# Altium PCB SFCmasterD.PcbDoc (part 4 of 7)
Units mm, origin at the board's own origin, x right, y up, seen from the top; angles counter-clockwise.
Board outline 152.4 x 101.6 mm, 2 copper layers (Top Layer, Bottom Layer); 249 components, 250 nets, 987 pads, 265 vias.
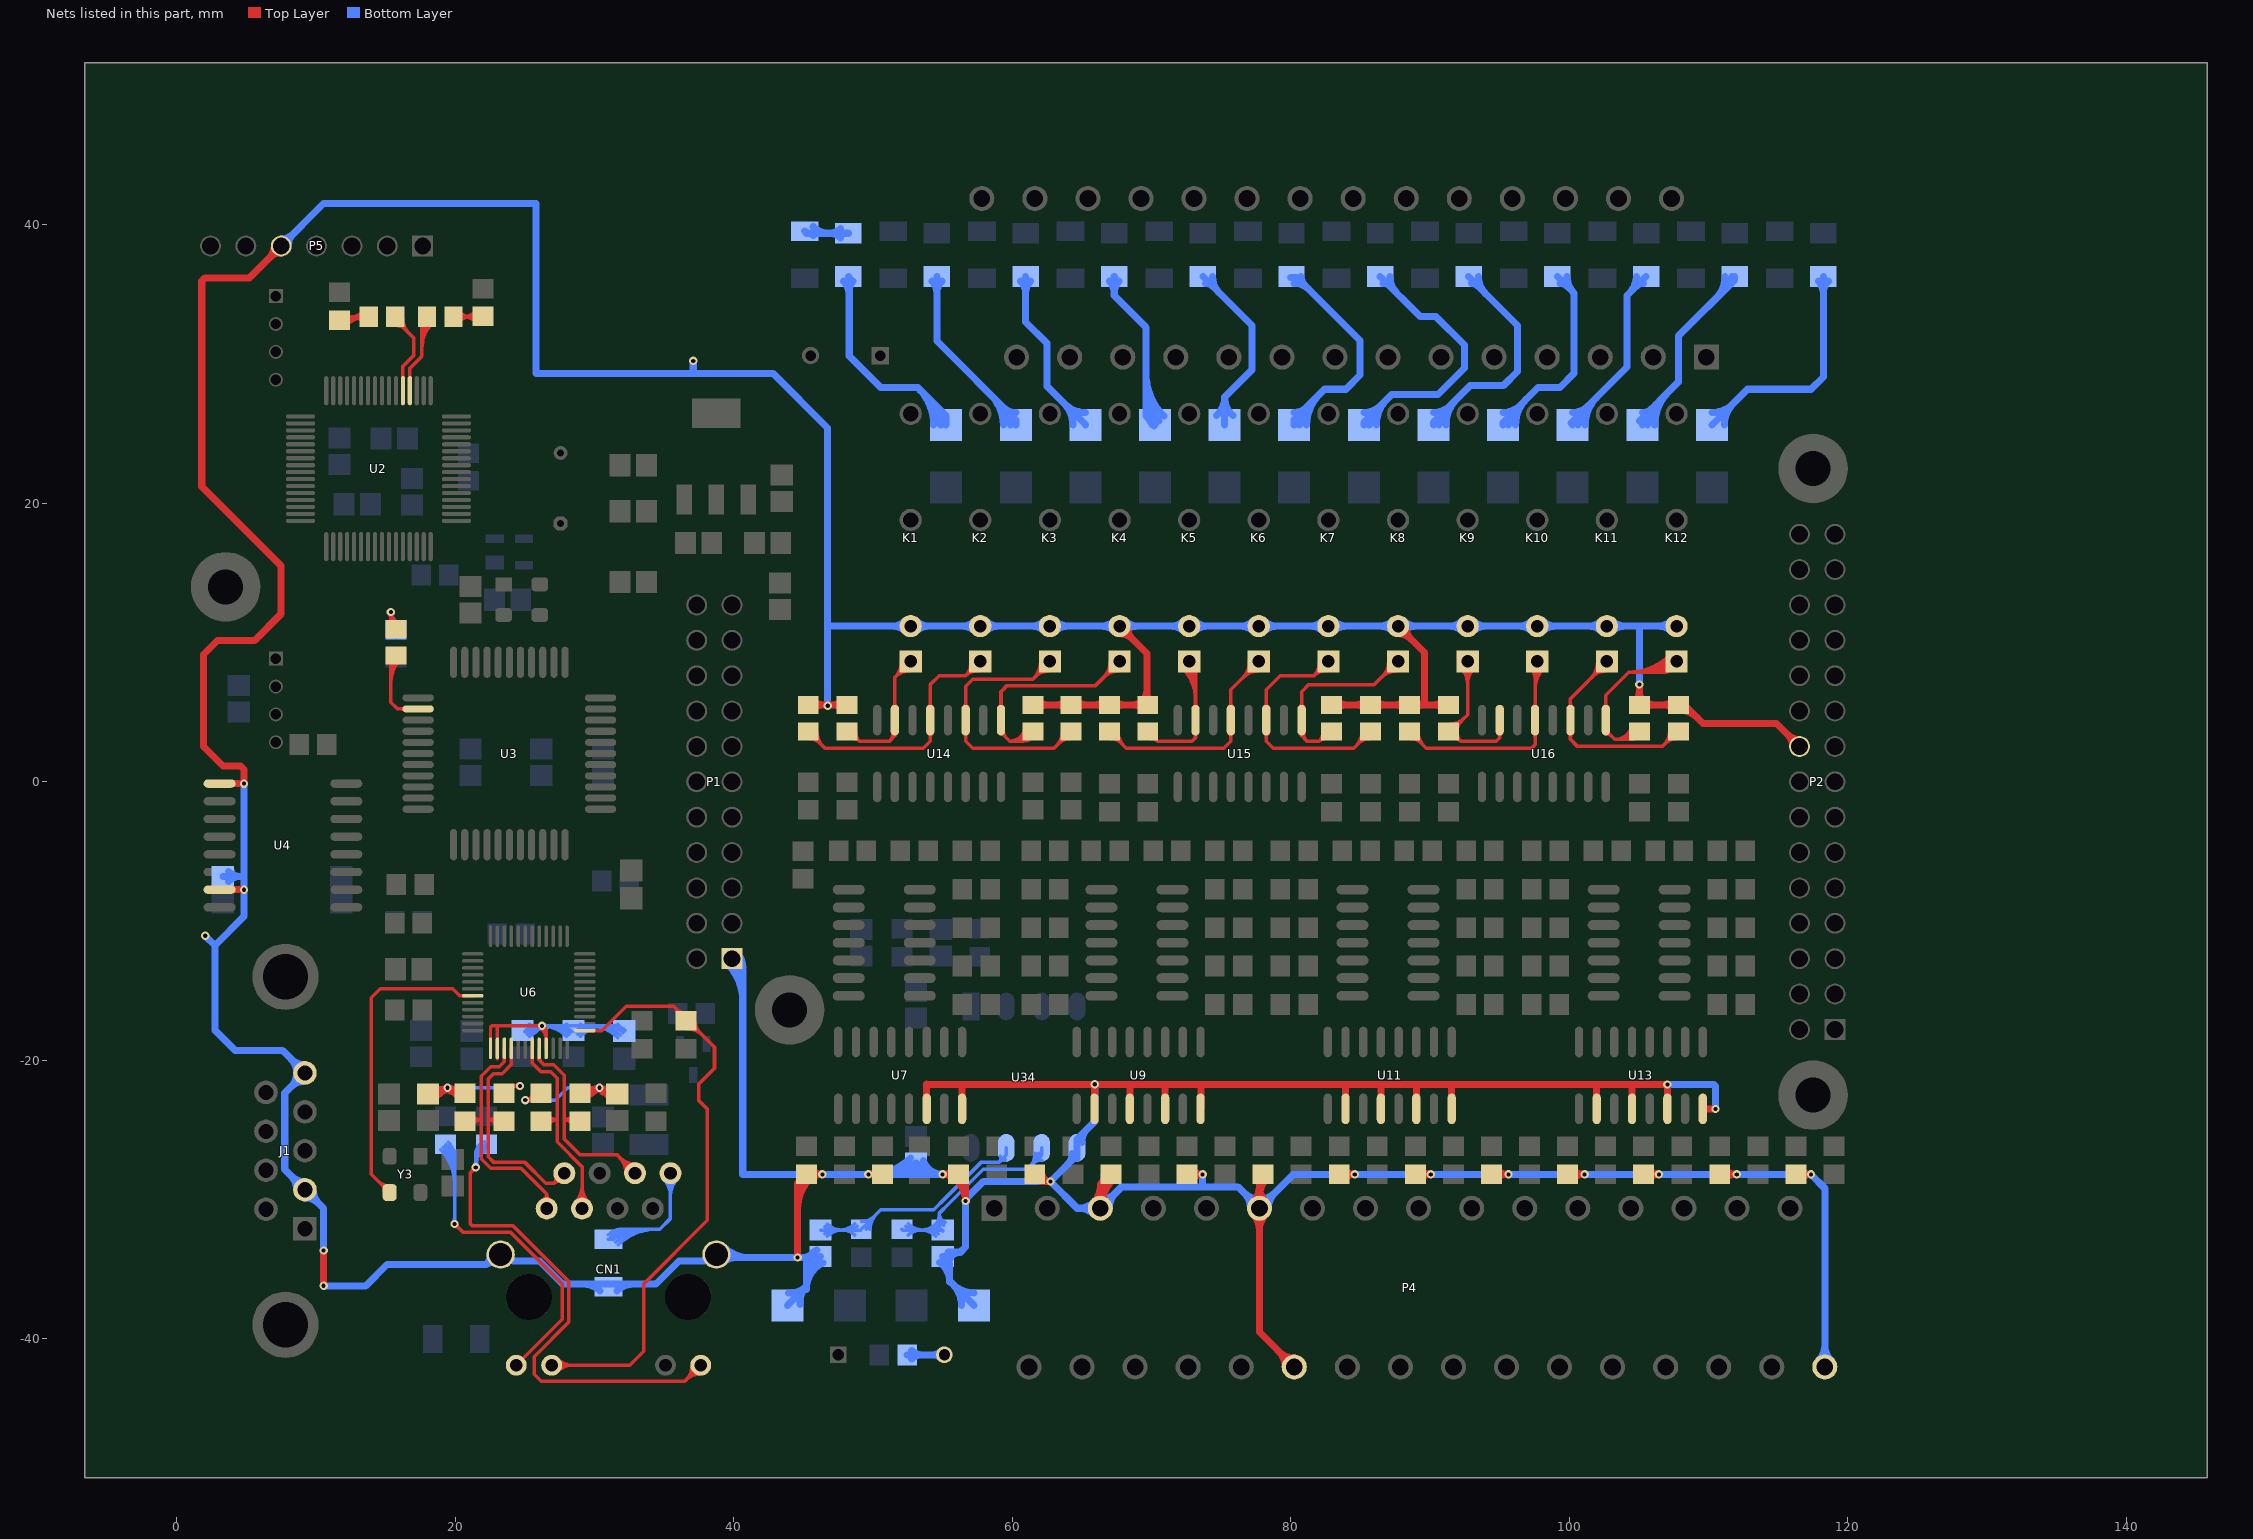
[diagram p4: the nets of this part, all layers, seen from the top]

## Via types
v1: diameter 0.6, hole 0.3, Top Layer to Bottom Layer, 265 vias

## Nets (pads, with @x,y where several pads share a name; then routed paths per layer and width w, separated by ;. In a path a pad name is that pad's centre, name@x,y a point inside that pad or via, vN(x,y) a via of type N, cw(c..) or ccw(c..) an arc to the next point about the centre after c; other vN are vias at no path point) (continued)
GNDA: C24.1 C25.1 C26.2 C41.2 CN1.13 CN1.14 D10.1 D12.1 D14.1 D16.1 D18.1 D20.1 D22.1 D24.1 D26.1 D28.1 D30.1 D32.1 D33.1 D34.1 J1.2 J1.5 K1.5 K2.5 K3.5 K4.5 K5.5 K6.5 K7.5 K8.5 K9.5 K10.5 K11.5 K12.5 LR3.2 P1.1 P2.18 P4.5 P4.11 P4.12 P4.32 P5.5 R22.1 R27.1 R32.1 R37.1 R42.1 R47.1 R52.1 R69.1 R74.1 R79.1 R84.1 R89.1 R94.1 R99.1 U4.9 U4.15 U7.6 U7.8 U9.2 U9.4 U9.6 U9.8 U11.2 U11.4 U11.6 U11.8 U13.2 U13.4 U13.6 U13.8 U34.5 | length 781
  Top Layer w0.508: U4.15@3.07,-7.747 v1(4.826,-7.747) ; U4.9@3.07,-0.127 v1(4.826,-0.127) 4.826,0.889 4.572,1.143 3.302,1.143 1.905,2.54 1.905,9.144 2.921,10.16 5.588,10.16 7.493,12.065 7.493,15.494 1.789,21.198 1.789,35.952 2.032,36.195 5.207,36.195 P5.5@7.493,38.481 ; P5.5@6.997,38.481 cw(c5.8,38.481) 6.646,37.634 cw(c7.493,36.788) P5.5@7.493,37.985 ; v1(10.541,-36.195) v1(10.541,-33.655) ; v1(44.577,-34.163) 44.577,-28.813 R22.1@45.212,-28.178 45.228,-28.194 v1(46.355,-28.194) cw(c46.355,-27.116) R22.1@45.582,-27.867 ; 44.577,-30.667 cw(c47.651,-30.667) R22.1@45.477,-28.493 ; 44.577,-29.441 cw(c46.425,-29.441) R22.1@45.118,-28.134 ; D12.1@45.339,5.522 D10.1@48.133,5.522 ; R22.1@45.577,-28.493 cw(c46.3,-29.216) v1@46.3,-28.194 ; D12.1@45.719,5.242 cw(c46.395,4.566) 46.395,5.522 cw(c46.395,6.478) D12.1@45.719,5.802 ; D10.1@47.753,5.242 ccw(c47.077,4.566) 47.077,5.522 ccw(c47.077,6.478) D10.1@47.753,5.802 ; R27.1@50.282,-27.897 cw(c49.657,-27.389) v1(49.657,-28.194) ; R27.1@50.297,-28.478 ccw(c49.657,-29.059) v1(49.657,-28.194) ; R27.1@50.678,-28.178 50.694,-28.194 v1(49.657,-28.194) ; U7.6@53.848,-23.482 53.848,-21.717 53.868,-21.737 56.388,-21.737 ; v1@55.055,-28.194 cw(c55.055,-29.216) R32.1@55.778,-28.493 ; R32.1@55.775,-27.865 cw(c54.991,-27.094) v1(54.991,-28.194) R32.1@56.159,-28.194 ; R32.1@55.9,-28.514 cw(c54.466,-30.151) v1@56.642,-30.151 ; R32.1@56.143,-28.178 R32.1@56.159,-28.194 ; R32.1@56.234,-28.131 cw(c55.447,-29.03) 56.642,-29.03 ; U7.8@56.388,-23.482 56.388,-21.737 ; v1(56.642,-30.099) 56.642,-28.677 R32.1@56.159,-28.194 ; D16.1@61.468,5.522 D14.1@64.22,5.522 D20.1@66.971,5.522 D18.1@69.723,5.522 ; R37.1@61.597,-28.185 ccw(c62.173,-28.123) R37.1@62.173,-28.702 ; R37.1@61.609,-28.178 62.133,-28.702 v1(62.738,-28.702) cw(c62.738,-28.063) R37.1@62.103,-28.131 ; D16.1@61.848,5.242 cw(c62.524,4.566) 62.524,5.522 cw(c62.524,6.478) D16.1@61.848,5.802 ; D14.1@63.84,5.242 ccw(c63.164,4.566) 63.164,5.522 ccw(c63.164,6.478) D14.1@63.84,5.802 ; D14.1@64.6,5.242 cw(c65.276,4.566) 65.276,5.522 cw(c65.276,6.478) D14.1@64.6,5.802 ; P4.5@65.857,-30.165 ccw(c64.754,-29.062) 66.314,-29.062 ccw(c67.874,-29.062) P4.5@66.771,-30.165 ; U9.2@65.893,-23.482 v1@65.893,-21.737 ; P4.5@66.314,-30.723 cw(c69.246,-30.723) R42.1@67.318,-28.514 ; P4.5@66.314,-30.622 66.314,-28.939 ; 66.314,-29.605 cw(c68.271,-29.605) R42.1@66.984,-28.131 ; 66.349,-28.904 cw(c67.025,-29.58) R42.1@67.025,-28.624 ; R42.1@66.58,-28.214 cw(c65.664,-28.289) 66.314,-28.939 ; D20.1@66.591,5.242 ccw(c65.915,4.566) 65.915,5.522 ccw(c65.915,6.478) D20.1@66.591,5.802 ; R42.1@67.075,-28.178 66.314,-28.939 ; D20.1@67.351,5.242 cw(c68.027,4.566) 68.027,5.522 cw(c68.027,6.478) D20.1@67.351,5.802 ; K4.5@67.696,10.638 cw(c67.696,9.32) 68.628,10.252 cw(c69.56,11.184) K4.5@68.242,11.184 ; K4.5@67.696,11.184 69.657,9.223 D18.1@69.657,5.522 ; U9.4@68.433,-23.482 68.433,-21.737 ; D18.1@69.343,5.242 ccw(c68.667,4.566) 68.667,5.522 ccw(c68.667,6.478) 69.343,5.802 ccw(c68.585,6.56) 69.657,6.56 ; 69.657,6.396 ccw(c70.497,6.396) D18.1@69.903,5.802 ; U9.6@70.973,-23.482 70.973,-21.737 ; R47.1@72.54,-28.178 72.556,-28.194 v1(73.66,-28.194) cw(c73.66,-27.171) R47.1@72.915,-27.872 ; R47.1@72.906,-28.493 cw(c73.629,-29.216) v1@73.629,-28.194 ; U9.8@73.513,-23.482 73.533,-23.462 73.533,-21.758 73.513,-21.737 ; P4.11@77.287,-31.079 cw(c76.184,-32.182) 77.744,-32.182 cw(c79.304,-32.182) P4.11@78.201,-31.079 ; P4.11@77.287,-30.165 ccw(c76.184,-29.062) 77.744,-29.062 ccw(c79.304,-29.062) P4.11@78.201,-30.165 ; P4.11@77.744,-29.767 cw(c79.545,-29.767) R52.1@78.272,-28.493 ; R52.1@78.006,-28.178 77.744,-28.44 P4.11@77.744,-30.622 77.744,-39.522 P4.12@80.244,-42.022 ; P4.12@79.598,-42.022 ccw(c78.038,-42.022) 79.141,-40.919 ccw(c80.244,-39.816) P4.12@80.244,-41.376 ; D24.1@82.931,5.522 D22.1@85.725,5.522 D28.1@88.519,5.522 D26.1@91.313,5.522 ; D24.1@83.311,5.242 cw(c83.987,4.566) 83.987,5.522 cw(c83.987,6.478) D24.1@83.311,5.802 ; R69.1@83.472,-28.178 83.488,-28.194 v1(84.582,-28.194) cw(c84.582,-27.193) R69.1@83.849,-27.874 ; R69.1@83.837,-28.493 cw(c84.56,-29.216) v1@84.56,-28.194 ; U11.2@83.927,-23.482 83.927,-21.737 ; D22.1@85.345,5.242 ccw(c84.669,4.566) 84.669,5.522 ccw(c84.669,6.478) D22.1@85.345,5.802 ; D22.1@86.105,5.242 cw(c86.781,4.566) 86.781,5.522 cw(c86.781,6.478) D22.1@86.105,5.802 ; U11.4@86.467,-23.482 86.467,-21.737 ; K8.5@87.696,10.638 cw(c87.696,9.32) 88.628,10.252 cw(c89.56,11.184) K8.5@88.242,11.184 ; K8.5@87.696,11.184 89.596,9.284 89.596,5.588 ; D28.1@88.139,5.242 ccw(c87.463,4.566) 87.463,5.522 ccw(c87.463,6.478) D28.1@88.139,5.802 ; D28.1@88.899,5.242 cw(c89.575,4.566) 89.575,5.522 cw(c89.575,6.478) D28.1@88.899,5.802 ; R74.1@88.954,-28.194 v1(90.043,-28.194) cw(c90.043,-27.204) R74.1@89.315,-27.875 ; U11.6@89.007,-23.482 89.007,-21.737 ; R74.1@89.303,-28.493 cw(c90.026,-29.216) v1@90.026,-28.194 ; D26.1@90.933,5.242 ccw(c90.257,4.566) 90.257,5.522 ccw(c90.257,6.478) D26.1@90.933,5.802 ; U11.8@91.547,-23.482 91.547,-21.737 ; R79.1@94.403,-28.178 94.419,-28.194 v1(95.631,-28.194) ; R79.1@94.769,-28.493 cw(c95.491,-29.216) v1@95.491,-28.194 ; R79.1@94.769,-27.863 ccw(c95.569,-27.063) v1@95.569,-28.194 ; R84.1@99.869,-28.178 99.885,-28.194 v1(101.092,-28.194) ; R84.1@100.234,-28.493 cw(c100.957,-29.216) v1@100.957,-28.194 ; R84.1@100.234,-27.863 ccw(c101.034,-27.063) v1@101.034,-28.194 ; U13.2@101.961,-23.482 101.961,-21.737 ; U13.4@104.501,-23.482 104.501,-21.737 ; D32.1@104.749,5.802 ccw(c104.073,6.478) 105.029,6.478 ccw(c105.985,6.478) D32.1@105.309,5.802 ; v1(105.029,6.985) D32.1@105.029,5.522 D30.1@107.823,5.522 108.27,5.522 109.601,4.191 114.879,4.191 P2.18@116.53,2.54 ; R89.1@105.335,-28.178 105.351,-28.194 v1(106.426,-28.194) cw(c106.426,-27.236) R89.1@105.715,-27.879 ; D32.1@105.409,5.242 cw(c106.085,4.566) 106.085,5.522 cw(c106.085,6.478) D32.1@105.409,5.802 ; R89.1@105.7,-28.493 cw(c106.423,-29.216) v1@106.423,-28.194 ; U13.6@107.041,-23.482 v1(107.041,-21.737) 104.501,-21.737 ; D30.1@107.443,5.242 ccw(c106.767,4.566) 106.767,5.522 ccw(c106.767,6.478) D30.1@107.443,5.802 ; D30.1@107.923,5.126 cw(c107.923,3.332) 109.191,4.601 ; U13.8@109.581,-23.482 109.594,-23.495 v1(110.49,-23.495) ; R94.1@110.8,-28.178 110.816,-28.194 v1(112.014,-28.194) ; R94.1@111.166,-28.493 cw(c111.888,-29.216) v1@111.888,-28.194 ; R94.1@111.166,-27.863 ccw(c111.966,-27.063) v1@111.966,-28.194 ; P2.18@116.034,2.54 ccw(c114.837,2.54) 115.683,3.387 ccw(c116.53,4.233) P2.18@116.53,3.036 ; R99.1@116.266,-28.178 116.282,-28.194 v1(117.348,-28.194) ; R99.1@116.633,-28.492 cw(c117.348,-29.201) v1(117.348,-28.194) ; R99.1@116.649,-27.881 ccw(c117.348,-27.257) v1(117.348,-28.194) ; 56.388,-21.737 v1@65.893,-21.737 ; v1@65.893,-21.737 68.433,-21.737 ; 68.433,-21.737 70.973,-21.737 ; 70.973,-21.737 73.513,-21.737 ; 73.513,-21.737 83.927,-21.737 ; 83.927,-21.737 86.467,-21.737 ; 86.467,-21.737 89.007,-21.737 ; 89.007,-21.737 91.547,-21.737 ; 91.547,-21.737 101.961,-21.737 ; 101.961,-21.737 104.501,-21.737
  Bottom Layer w0.508: v1(2.032,-11.049) 2.73,-11.747 ; C41.2@3.302,-6.797 4.76,-6.797 ; C41.2@3.703,-7.148 cw(c4.549,-7.994) 4.549,-6.797 cw(c4.549,-5.6) C41.2@3.703,-6.446 ; v1(4.826,-0.127) v1(4.826,-7.747) 4.826,-9.652 2.73,-11.747 ; P5.5@7.493,38.481 10.541,41.529 25.781,41.529 25.781,29.337 42.799,29.337 46.736,25.4 v1(46.736,5.461) ; P5.5@7.493,38.977 ccw(c7.493,40.174) 8.34,39.328 ccw(c9.186,38.481) P5.5@7.989,38.481 ; J1.2@8.608,-29.298 ccw(c7.181,-29.298) 8.19,-28.289 ccw(c9.199,-27.28) J1.2@9.199,-28.707 ; J1.5@9.07,-20.776 9.07,-21.033 7.747,-22.356 7.747,-27.846 10.543,-30.642 v1@10.543,-33.655 ; J1.2@9.199,-29.889 cw(c9.199,-31.316) 10.208,-30.307 cw(c11.217,-29.298) J1.2@9.79,-29.298 ; J1.5@9.199,-21.495 ccw(c9.199,-22.922) 8.19,-21.913 ccw(c7.181,-20.904) 8.608,-20.904 ccw(c7.181,-20.904) 8.19,-19.895 ccw(c9.199,-18.886) J1.5@9.199,-20.313 ; J1.5@9.199,-20.904 7.599,-19.304 4.191,-19.304 2.73,-17.843 2.73,-11.747 ; v1(10.541,-36.195) 13.56,-36.195 15.084,-34.671 22.225,-34.671 ; CN1.14@22.492,-33.982 cw(c21.579,-34.025) 22.225,-34.671 ; CN1.14@22.855,-34.597 ccw(c22.587,-35.033) 22.225,-34.671 ; 29.186,-36.068 cw(c29.186,-37.746) LR3.2@30.373,-36.559 ; LR3.2@31.603,-36.559 cw(c32.79,-37.746) 32.79,-36.068 ; 37.084,29.337 v1(37.084,30.226) ; CN1.13@38.927,-33.767 ccw(c39.882,-32.812) 39.882,-34.163 ; CN1.13@39.286,-34.486 cw(c40.065,-35.265) 40.065,-34.163 ; CN1.13@39.286,-33.408 ccw(c41.108,-31.586) 41.108,-34.163 ; P1.1@39.519,-13.051 cw(c36.814,-15.756) 40.64,-15.756 ; P1.1@39.87,-12.7 40.64,-13.47 ; P1.1@39.878,-12.692 cw(c38.04,-14.53) 40.64,-14.53 ; P1.1@39.904,-13.195 cw(c39.97,-14.14) 40.64,-13.47 ; P1.1@40.238,-12.332 cw(c39.266,-13.304) 40.64,-13.304 ; P1.1@40.365,-12.734 ccw(c41.31,-12.8) 40.64,-13.47 ; D33.1@43.851,-37.592 45.212,-36.231 ; D33.1@43.928,-36.699 ccw(c44.067,-35.086) 45.212,-36.231 ; D33.1@44.744,-37.515 cw(c46.357,-37.376) 45.212,-36.231 ; v1@44.821,-34.163 ccw(c44.821,-32.74) C24.1@45.827,-33.746 ; 45.14,-34.163 cw(c45.14,-35.135) C24.1@45.827,-34.448 ; 45.212,-36.439 cw(c47.323,-36.439) C24.1@46.396,-34.543 ; 45.212,-35.625 cw(c46.925,-35.625) C24.1@46.173,-34.086 ; 45.212,-34.812 cw(c46.527,-34.812) C24.1@45.95,-33.63 ; C24.1@46.228,-34.097 46.162,-34.163 45.212,-34.163 ; 46.863,11.184 K1.5@52.696,11.184 K2.5@57.696,11.184 K3.5@62.696,11.184 K4.5@67.696,11.184 K5.5@72.696,11.184 K6.5@77.696,11.184 K7.5@82.696,11.184 K8.5@87.696,11.184 K9.5@92.696,11.184 K10.5@97.696,11.184 K11.5@102.696,11.184 K12.5@107.696,11.184 ; v1@49.84,-28.194 ccw(c49.84,-24.17) C26.2@52.685,-27.015 ; 51.066,-28.194 ccw(c51.066,-25.396) C26.2@53.044,-27.374 ; 52.292,-28.194 ccw(c52.292,-26.622) C26.2@53.404,-27.734 ; K1.5@52.31,10.798 ccw(c51.378,9.866) 51.378,11.184 ccw(c51.378,12.502) K1.5@52.31,11.57 ; C26.2@52.644,-27.535 ccw(c53.568,-27.218) 53.568,-28.194 ; K1.5@53.082,10.798 cw(c54.014,9.866) 54.014,11.184 cw(c54.014,12.502) K1.5@53.082,11.57 ; C26.2@53.125,-27.37 ccw(c54.279,-26.973) 54.279,-28.194 ; 53.519,-28.194 ccw(c53.519,-27.849) C26.2@53.763,-28.093 ; C26.2@53.605,-27.205 ccw(c54.991,-26.729) v1(54.991,-28.194) v1(49.657,-28.194) v1(46.355,-28.194) 40.64,-28.194 40.64,-13.47 ; C25.1@54.76,-34.506 cw(c53.798,-35.909) 55.499,-35.909 ; C25.1@54.991,-34.097 55.499,-34.605 55.499,-35.85 D34.1@57.241,-37.592 ; C25.1@55.048,-34.087 cw(c54.46,-34.944) 55.499,-34.944 ; C25.1@55.372,-33.782 56.261,-33.782 ; C25.1@55.498,-34.289 cw(c56.261,-34.609) 56.261,-33.782 ; D34.1@56.345,-37.592 ccw(c54.182,-37.592) 55.711,-36.062 ccw(c57.241,-34.533) D34.1@57.241,-36.696 ; v1@56.688,-30.099 cw(c57.106,-30.099) 56.81,-29.804 ; K2.5@57.31,10.798 ccw(c56.378,9.866) 56.378,11.184 ccw(c56.378,12.502) K2.5@57.31,11.57 ; K2.5@58.082,10.798 cw(c59.014,9.866) 59.014,11.184 cw(c59.014,12.502) K2.5@58.082,11.57 ; K3.5@62.31,10.798 ccw(c61.378,9.866) 61.378,11.184 ccw(c61.378,12.502) K3.5@62.31,11.57 ; K3.5@63.082,10.798 cw(c64.014,9.866) 64.014,11.184 cw(c64.014,12.502) K3.5@63.082,11.57 ; 63.976,-27.464 ccw(c63.201,-26.689) U34.5@64.297,-26.689 ; 64.237,-27.203 cw(c64.643,-27.61) U34.5@64.643,-27.035 ; U34.5@64.989,-25.889 cw(c66.392,-25.889) 65.4,-24.897 ; P4.5@65.857,-31.079 ccw(c64.754,-32.182) 64.754,-30.622 ccw(c64.754,-29.062) P4.5@65.857,-30.165 ; v1(65.913,-21.717) 65.913,-24.384 64.643,-25.654 U34.5@64.643,-26.289 64.643,-26.797 v1(62.738,-28.702) ; P4.5@66.314,-29.976 ccw(c66.314,-28.416) 67.417,-29.519 ccw(c68.52,-30.622) P4.5@66.96,-30.622 ; K4.5@67.31,10.798 ccw(c66.378,9.866) 66.378,11.184 ccw(c66.378,12.502) K4.5@67.31,11.57 ; K4.5@68.082,10.798 cw(c69.014,9.866) 69.014,11.184 cw(c69.014,12.502) K4.5@68.082,11.57 ; K5.5@72.31,10.798 ccw(c71.378,9.866) 71.378,11.184 ccw(c71.378,12.502) K5.5@72.31,11.57 ; K5.5@73.082,10.798 cw(c74.014,9.866) 74.014,11.184 cw(c74.014,12.502) K5.5@73.082,11.57 ; v1(73.66,-28.194) 73.66,-29.083 ; P4.11@77.098,-30.622 ccw(c75.538,-30.622) 76.641,-29.519 ccw(c77.744,-28.416) 77.744,-29.976 ccw(c77.744,-28.416) 78.847,-29.519 ccw(c79.95,-30.622) P4.11@78.39,-30.622 ; K6.5@77.31,10.798 ccw(c76.378,9.866) 76.378,11.184 ccw(c76.378,12.502) K6.5@77.31,11.57 ; K6.5@78.082,10.798 cw(c79.014,9.866) 79.014,11.184 cw(c79.014,12.502) K6.5@78.082,11.57 ; K7.5@82.31,10.798 ccw(c81.378,9.866) 81.378,11.184 ccw(c81.378,12.502) K7.5@82.31,11.57 ; K7.5@83.082,10.798 cw(c84.014,9.866) 84.014,11.184 cw(c84.014,12.502) K7.5@83.082,11.57 ; K8.5@87.31,10.798 ccw(c86.378,9.866) 86.378,11.184 ccw(c86.378,12.502) K8.5@87.31,11.57 ; K8.5@88.082,10.798 cw(c89.014,9.866) 89.014,11.184 cw(c89.014,12.502) K8.5@88.082,11.57 ; K9.5@92.31,10.798 ccw(c91.378,9.866) 91.378,11.184 ccw(c91.378,12.502) K9.5@92.31,11.57 ; K9.5@93.082,10.798 cw(c94.014,9.866) 94.014,11.184 cw(c94.014,12.502) K9.5@93.082,11.57 ; K10.5@97.31,10.798 ccw(c96.378,9.866) 96.378,11.184 ccw(c96.378,12.502) K10.5@97.31,11.57 ; K10.5@98.082,10.798 cw(c99.014,9.866) 99.014,11.184 cw(c99.014,12.502) K10.5@98.082,11.57 ; K11.5@102.31,10.798 ccw(c101.378,9.866) 101.378,11.184 ccw(c101.378,12.502) K11.5@102.31,11.57 ; K11.5@103.082,10.798 cw(c104.014,9.866) 104.014,11.184 cw(c104.014,12.502) K11.5@103.082,11.57 ; v1(105.029,6.985) 105.029,11.017 ; v1(107.041,-21.737) 110.383,-21.737 110.49,-21.844 v1(110.49,-23.495) ; K12.5@107.31,10.798 ccw(c106.378,9.866) 106.378,11.184 ccw(c106.378,12.502) K12.5@107.31,11.57 ; P4.32@117.887,-41.565 ccw(c116.784,-40.462) 118.344,-40.462 ccw(c119.904,-40.462) P4.32@118.801,-41.565 ; P4.32@118.344,-42.022 118.344,-29.19 v1(117.348,-28.194) v1(112.014,-28.194) v1(106.426,-28.194) v1(101.092,-28.194) v1(95.631,-28.194) v1(90.043,-28.194) v1(84.582,-28.194) 80.172,-28.194 P4.11@77.744,-30.622 76.205,-29.083 73.66,-29.083 ; 22.225,-34.671 22.949,-33.947 23.66,-33.947 24.13,-34.417 26.035,-34.417 27.686,-36.068 34.417,-36.068 36.068,-34.417 37.973,-34.417 38.443,-33.947 CN1.13@38.747,-33.947 38.963,-34.163 v1(44.577,-34.163) 45.212,-34.163 ; 45.212,-36.231 45.212,-34.163 ; 45.212,-34.163 ccw(c45.212,-33.548) 45.747,-33.852 cw(c45.212,-33.548) 45.212,-34.163 ; 45.212,-34.163 cw(c45.212,-34.967) 45.809,-34.429 ccw(c45.212,-34.967) 45.212,-34.163 ; 56.261,-33.782 56.642,-33.401 v1(56.642,-30.099) 56.642,-29.972 57.912,-28.702 v1(62.738,-28.702) ; v1(62.738,-28.702) 64.658,-30.622 P4.5@66.314,-30.622 67.853,-29.083 73.66,-29.083
HSE_CLK: U6.43 Y3.3 | length 23.7
  Top Layer w0.254: 14.476,-28.687 ccw(c15.283,-27.879) Y3.3@15.283,-29.021 ; 14.717,-28.928 cw(c14.251,-29.394) Y3.3@14.91,-29.394 ; Y3.3@15.283,-29.494 13.97,-28.181 13.97,-15.494 14.605,-14.859 19.812,-14.859 20.316,-15.363 U6.43@21.248,-15.363
LED1: LED1.2 U2.20 | length 10.4
  Top Layer w0.254: U2.20@16.751,28.111 U2.20@16.728,28.088 16.728,29.682 17.592,30.546 LED1.2@17.592,33.537 ; 17.592,31.119 cw(c20.155,31.119) LED1.2@18.343,32.931 ; 17.592,31.732 cw(c19.542,31.732) LED1.2@18.163,33.111 ; 17.592,32.345 cw(c18.929,32.345) LED1.2@17.984,33.29
LED2: LED2.2 U2.21 | length 9.3
  Top Layer w0.254: LED2.2@15.207,33.688 17.018,31.877 17.018,30.614 16.228,29.824 U2.21@16.228,28.088 ; LED2.2@15.682,32.778 cw(c15.682,31.728) 16.425,32.47 ; LED2.2@15.951,33.301 ccw(c16.813,33.301) LED2.2@16.203,32.692 ; LED2.2@16.205,33.301 ccw(c17.68,33.301) 16.637,32.258
LINKACT2: CN1.10 R19.2 U6.13 | length 51.8
  Top Layer w0.25: U6.13@29.298,-17.863 30.524,-17.863 32.258,-16.129 35.687,-16.129 ; 35.874,-16.316 ccw(c36.526,-15.664) R19.2@36.526,-16.586 ; R19.2@35.963,-17.046 ccw(c34.972,-16.844) 35.687,-16.129 ; 36.016,-16.458 cw(c35.518,-16.955) R19.2@36.208,-17.096 ; R19.2@37.211,-17.653 35.687,-16.129
  Top Layer w0.254: CN1.10@26.939,-41.895 32.527,-41.895 33.528,-40.894 33.528,-36.061 38.1,-31.489 38.1,-23.495 37.465,-22.86 37.465,-21.717 38.608,-20.574 38.608,-19.05 R19.2@37.211,-17.653 ; CN1.10@27.176,-42.156 cw(c27.806,-42.786) 27.806,-41.895 cw(c27.806,-41.004) CN1.10@27.176,-41.634 ; CN1.10@27.356,-42.336 cw(c28.419,-43.399) 28.419,-41.895 cw(c28.419,-40.391) CN1.10@27.356,-41.454 ; R19.2@36.626,-17.734 cw(c36.626,-19.342) 37.763,-18.205 ; R19.2@36.626,-17.48 cw(c36.626,-18.475) 37.329,-17.771 ; R19.2@37.199,-17.161 ccw(c38.358,-17.161) 37.538,-17.98
NetC10_1: C10.1 R8.1 R15.1 | length 32.9
  Top Layer w0.25: v1@25.143,-22.984 cw(c25.441,-23.282) 25.441,-22.86 cw(c25.441,-22.438) v1@25.143,-22.736 ; v1@25.148,-22.742 ccw(c25.35,-22.557) R8.1@25.42,-22.821 ; v1@25.275,-22.86 ccw(c25.275,-22.348) R8.1@25.787,-22.36 ; R8.1@25.531,-22.86 ccw(c25.531,-22.354) R8.1@26.037,-22.366 ; R8.1@25.537,-22.354 cw(c25.019,-22.342) v1(25.019,-22.86) 25.543,-22.86 R8.1@26.162,-22.241 ; R15.1@28.956,-22.241 R15.1@29.226,-21.971 ; R15.1@29.06,-22.42 cw(c30.121,-23.45) v1@30.121,-21.971 ; R15.1@29.239,-22.594 cw(c30.712,-24.023) 30.712,-21.971 ; R15.1@29.419,-22.768 cw(c31.303,-24.596) C10.1@31.303,-21.971 ; 29.77,-22.524 ccw(c29.263,-21.731) v1@30.182,-21.933 ; 29.773,-21.971 cw(c29.773,-23.977) C10.1@31.29,-22.664 ; 29.784,-22.081 ccw(c29.867,-21.718) v1@30.198,-21.89 ; 29.79,-22.06 cw(c29.952,-22.666) v1@30.265,-22.123 ; 29.922,-22.204 ccw(c29.703,-21.736) v1@30.188,-21.911 ; 30.043,-22.147 cw(c30.182,-22.444) v1@30.293,-22.136 ; 30.098,-22.154 ccw(c30.163,-21.872) v1@30.42,-22.006 ; v1@30.229,-22.095 ccw(c29.931,-22.393) 29.931,-21.971 ccw(c29.931,-21.549) v1@30.229,-21.847 ; v1@30.279,-21.984 ccw(c30.92,-21.871) 30.547,-22.404 ; v1@30.321,-21.971 cw(c30.321,-23.503) C10.1@31.479,-22.5 ; v1@30.44,-22.123 cw(c30.637,-22.464) 30.739,-22.083 ; v1@30.477,-22.095 cw(c30.775,-22.393) 30.775,-21.971 cw(c30.775,-21.549) v1@30.477,-21.847 ; v1@30.505,-21.884 ccw(c30.895,-21.658) 30.778,-22.094 ; v1@30.506,-21.886 ccw(c30.799,-21.725) C10.1@30.859,-22.053 ; v1@30.524,-21.933 ccw(c31.17,-21.788) 30.815,-22.348 ; v1@30.525,-21.94 ccw(c31.76,-21.722) C10.1@31.042,-22.75 ; C10.1@30.868,-21.971 cw(c30.868,-23.029) C10.1@31.667,-22.336 ; C10.1@31.101,-22.827 ccw(c29.226,-24.451) R15.1@29.226,-21.971 ; C10.1@31.623,-22.291 C10.1@31.303,-21.971 ; R15.1@29.226,-21.971 C10.1@31.303,-21.971
  Bottom Layer w0.25: v1(25.019,-22.86) 27.178,-22.86 28.067,-21.971 v1(30.353,-21.971) ; v1@25.143,-22.984 cw(c25.441,-23.282) 25.441,-22.86 cw(c25.441,-22.438) v1@25.143,-22.736 ; v1@30.229,-22.095 ccw(c29.931,-22.393) 29.931,-21.971 ccw(c29.931,-21.549) v1@30.229,-21.847
NetC11_1: C11.1 R17.1 R18.1 | length 29.9
  Top Layer w0.25: C11.1@17.99,-22.336 cw(c18.789,-23.029) C11.1@18.789,-21.971 ; C11.1@18.034,-22.291 C11.1@18.354,-21.971 ; C11.1@18.178,-22.5 cw(c19.336,-23.503) v1@19.336,-21.971 ; C11.1@18.367,-22.664 cw(c19.884,-23.977) 19.884,-21.971 ; C11.1@18.556,-22.827 cw(c20.431,-24.451) R17.1@20.431,-21.971 ; C11.1@18.816,-22.613 ccw(c18.223,-21.74) v1@19.259,-21.938 ; 18.867,-22.07 ccw(c18.945,-21.692) v1@19.279,-21.884 ; 18.945,-21.971 cw(c18.945,-24.023) R17.1@20.418,-22.594 ; 18.959,-22.072 cw(c19.09,-22.561) v1@19.343,-22.123 ; 18.987,-22.262 ccw(c18.714,-21.759) v1@19.263,-21.921 ; 19.074,-22.041 ccw(c18.986,-21.714) v1@19.279,-21.883 ; 19.174,-22.161 cw(c19.304,-22.4) v1@19.381,-22.139 ; v1@19.307,-22.095 ccw(c19.009,-22.393) 19.009,-21.971 ccw(c19.009,-21.549) v1@19.307,-21.847 ; 19.315,-22.274 ccw(c19.061,-21.9) v1@19.505,-21.985 ; v1@19.358,-21.986 ccw(c19.873,-21.879) 19.584,-22.32 ; v1@19.48,-22.139 cw(c19.55,-22.382) 19.672,-22.16 ; v1@19.519,-22.123 cw(c19.776,-22.569) 19.909,-22.071 ; v1@19.536,-21.971 cw(c19.536,-23.45) R17.1@20.597,-22.42 ; v1@19.555,-22.095 cw(c19.853,-22.393) 19.853,-21.971 cw(c19.853,-21.549) v1@19.555,-21.847 ; v1@19.583,-21.883 ccw(c19.868,-21.718) 19.783,-22.037 ; v1@19.584,-21.885 ccw(c19.898,-21.708) R17.1@19.969,-22.063 ; v1@19.599,-21.922 ccw(c20.168,-21.757) 19.882,-22.276 ; v1@19.602,-21.936 ccw(c20.709,-21.706) R17.1@20.089,-22.651 ; R17.1@20.238,-22.768 ccw(c18.354,-24.596) C11.1@18.354,-21.971 ; R17.1@20.701,-22.241 R17.1@20.431,-21.971 ; R18.1@23.495,-22.241 23.892,-21.844 v1(24.638,-21.844) ; v1@24.514,-21.968 ccw(c24.216,-22.266) 24.216,-21.844 ccw(c24.216,-21.422) v1@24.514,-21.72 ; C11.1@18.354,-21.971 R17.1@20.431,-21.971
  Bottom Layer w0.25: v1(19.431,-21.971) 23.495,-21.971 23.622,-21.844 v1(24.638,-21.844) ; v1@19.555,-22.095 cw(c19.853,-22.393) 19.853,-21.971 cw(c19.853,-21.549) v1@19.555,-21.847 ; v1@24.514,-21.968 ccw(c24.216,-22.266) 24.216,-21.844 ccw(c24.216,-21.422) v1@24.514,-21.72
NetC12_1: C12.1 C13.1 LR16.2 U6.1 U6.2 U6.9 | length 45.8
  Top Layer w0.25: U6.1@22.523,-19.138 22.523,-17.609 22.606,-17.526 v1(26.226,-17.526) 26.518,-17.818 ; U6.2@23.023,-19.9 U6.2@23.023,-19.138 23.023,-17.526 ; v1@26.102,-17.65 ccw(c25.803,-17.948) 25.803,-17.526 ccw(c25.803,-17.104) v1@26.102,-17.402 ; v1@26.113,-17.66 cw(c25.384,-18.529) U6.9@26.518,-18.529 ; v1@26.228,-17.701 cw(c26.234,-18.102) 26.518,-17.818 ; v1@26.274,-17.469 cw(c25.834,-17.992) 26.518,-17.992 ; v1@26.4,-17.529 ccw(c26.802,-17.535) 26.518,-17.818 ; U6.9@26.523,-19.138 26.523,-18.49 26.518,-18.485 26.518,-17.818
  Bottom Layer w0.25: C13.1@24.704,-17.526 31.761,-17.526 LR16.2@32.131,-17.896 ; C13.1@24.967,-17.934 cw(c25.953,-18.92) v1@25.953,-17.526 ; C13.1@25.144,-18.111 cw(c26.556,-19.524) 26.556,-17.526 ; C13.1@25.32,-18.288 cw(c27.16,-20.127) 27.16,-17.526 ; C13.1@25.32,-17.404 ccw(c25.615,-17.11) C13.1@25.615,-17.526 ; 25.635,-17.611 cw(c25.806,-18.252) v1@26.138,-17.678 ; 25.651,-18.07 ccw(c25.151,-17.292) v1@26.055,-17.489 ; 25.8,-17.75 ccw(c25.587,-17.293) v1@26.061,-17.466 ; 25.905,-17.702 cw(c26.049,-18.01) v1@26.166,-17.69 ; v1@26.102,-17.65 ccw(c25.803,-17.948) 25.803,-17.526 ccw(c25.803,-17.104) v1@26.102,-17.402 ; v1@26.148,-17.526 cw(c26.148,-20.127) C12.1@27.988,-18.288 ; v1@26.319,-17.674 cw(c26.516,-17.982) 26.595,-17.625 ; v1@26.349,-17.65 cw(c26.648,-17.948) 26.648,-17.526 cw(c26.648,-17.104) v1@26.349,-17.402 ; v1@26.373,-17.432 ccw(c26.778,-17.174) 26.674,-17.643 ; v1@26.379,-17.442 ccw(c26.665,-17.287) 26.724,-17.607 ; 26.752,-17.526 cw(c26.752,-19.524) C12.1@28.165,-18.111 ; 27.355,-17.526 cw(c27.355,-18.92) C12.1@28.341,-17.934 ; C12.1@27.693,-17.526 ccw(c27.693,-17.11) C12.1@27.988,-17.404 ; C12.1@28.618,-17.934 cw(c29.604,-18.92) 29.604,-17.526 ; C12.1@28.795,-18.111 cw(c30.208,-19.524) 30.208,-17.526 ; C12.1@28.972,-18.288 cw(c30.811,-20.127) 30.811,-17.526 ; C12.1@28.972,-17.404 ccw(c29.266,-17.11) C12.1@29.266,-17.526 ; 29.608,-17.526 cw(c29.608,-20.419) LR16.2@31.654,-18.373 ; 30.212,-17.526 cw(c30.212,-19.815) LR16.2@31.83,-18.197 ; 30.815,-17.526 cw(c30.815,-19.212) LR16.2@32.007,-18.02 ; LR16.2@31.395,-17.526 ccw(c31.395,-17.16) LR16.2@31.654,-17.419 ; LR16.2@31.419,-17.526 cw(c31.419,-18.608) LR16.2@32.184,-17.843
NetC24_2: C24.2 R121.2 U34.7 | length 26.6
  Bottom Layer w0.254: C24.2@46.228,-32.197 49.099,-32.197 R121.2@49.149,-32.147 ; C24.2@46.539,-32.458 cw(c47.169,-33.088) 47.169,-32.197 cw(c47.169,-31.306) C24.2@46.539,-31.936 ; C24.2@46.719,-32.638 cw(c47.782,-33.701) 47.782,-32.197 cw(c47.782,-30.693) C24.2@46.719,-31.756 ; 47.595,-32.197 ccw(c47.595,-30.643) R121.2@48.694,-31.742 ; 47.836,-32.197 cw(c47.836,-33.41) R121.2@48.694,-32.552 ; 48.208,-32.197 ccw(c48.208,-31.256) R121.2@48.873,-31.921 ; R121.2@49.149,-32.131 50.546,-30.734 54.349,-30.734 54.611,-30.472 54.616,-30.472 54.983,-30.105 54.983,-30.1 57.778,-27.305 59.055,-27.305 ; R121.2@49.199,-31.574 ccw(c49.199,-30.35) 50.065,-31.215 ; R121.2@49.518,-32.147 cw(c50.447,-32.147) R121.2@49.79,-31.49 ; R121.2@49.772,-32.147 cw(c51.315,-32.147) 50.224,-31.056 ; U34.7@59.132,-26.884 cw(c58.789,-27.039) 59.055,-27.305 ; U34.7@59.497,-27.157 ccw(c59.424,-27.674) 59.055,-27.305 ; U34.7@59.563,-26.289 59.563,-26.797 59.055,-27.305
NetC25_2: C25.2 R122.2 U34.6 | length 25.1
  Bottom Layer w0.254: R122.2@52.07,-32.147 52.12,-32.197 C25.2@54.991,-32.197 ; R122.2@52.346,-31.921 ccw(c53.011,-31.256) 53.011,-32.197 ; R122.2@52.525,-32.552 cw(c53.383,-33.41) 53.383,-32.197 ; R122.2@52.525,-31.742 ccw(c53.624,-30.643) 53.624,-32.197 ; C25.2@54.5,-32.638 ccw(c53.437,-33.701) 53.437,-32.197 ccw(c53.437,-30.693) 54.5,-31.756 ccw(c53.929,-31.185) 54.737,-31.185 ; C25.2@54.68,-32.458 ccw(c54.05,-33.088) 54.05,-32.197 ccw(c54.05,-31.306) C25.2@54.68,-31.936 ; 54.737,-31.359 ccw(c55.267,-31.359) C25.2@55.075,-31.853 ; C25.2@54.991,-32.258 54.737,-32.004 54.737,-30.988 ; C25.2@55.167,-31.616 cw(c55.411,-30.988) 54.737,-30.988 ; 61.219,-27.681 ccw(c60.227,-26.689) U34.6@61.63,-26.689 ; 61.48,-27.42 cw(c62.103,-28.043) U34.6@62.103,-27.162 ; 61.653,-27.247 ccw(c61.095,-26.689) U34.6@61.884,-26.689 ; U34.6@62.103,-26.289 62.103,-26.797 61.087,-27.813 57.912,-27.813 55.437,-30.288 55.437,-30.293 54.804,-30.926 54.799,-30.926 54.737,-30.988
NetCN1_1: CN1.1 R17.2 U6.3 | length 20
  Top Layer w0.25: R17.2@20.717,-24.257 21.852,-24.257 ; R17.2@21.043,-24.511 cw(c21.451,-24.711) R17.2@21.451,-24.257 ; R17.2@21.163,-23.966 ccw(c21.852,-23.294) 21.852,-24.257 ; R17.2@21.267,-24.621 cw(c21.852,-24.908) 21.852,-24.257 ; 21.852,-26.678 21.852,-24.257 ; U6.3@23.523,-19.138 23.523,-20.1 23.163,-20.46 22.531,-20.46 21.852,-21.139 21.852,-24.257
  Top Layer w0.254: 21.852,-26.678 21.852,-27.066 22.545,-27.759 24.711,-27.759 26.555,-29.603 ; CN1.1@26.273,-30.048 ccw(c26.063,-29.603) 26.555,-29.603 ; CN1.1@26.555,-30.645 26.555,-29.603 ; CN1.1@26.837,-30.048 cw(c27.047,-29.603) 26.555,-29.603
NetCN1_2: CN1.2 R18.2 U6.4 | length 19.6
  Top Layer w0.25: R18.2@22.75,-24.257 cw(c22.75,-24.703) R18.2@23.152,-24.509 ; R18.2@22.927,-24.618 ccw(c22.352,-24.896) 22.352,-24.257 ; R18.2@23.031,-23.969 cw(c22.352,-23.313) 22.352,-24.257 ; R18.2@23.479,-24.257 22.352,-24.257 ; U6.4@24.023,-19.138 24.023,-20.3 23.368,-20.955 22.736,-20.955 22.352,-21.339 22.352,-24.257
  Top Layer w0.254: 22.352,-24.257 22.354,-24.259 22.354,-26.926 22.733,-27.305 24.963,-27.305 26.487,-28.829 27.089,-28.829 ; CN1.2@27.203,-28.326 cw(c26.748,-28.487) 27.089,-28.829 ; CN1.2@27.59,-28.722 ccw(c27.422,-29.162) 27.089,-28.829 ; CN1.2@27.813,-28.105 27.089,-28.829
NetCN1_3: CN1.3 R8.2 U6.7 | length 20.1
  Top Layer w0.254: U6.7@25.523,-19.138 25.523,-20.197 26.154,-20.828 26.853,-20.828 27.305,-21.28 27.305,-24.257 ; R8.2@26.178,-24.257 27.305,-24.257 ; R8.2@26.623,-23.969 ccw(c27.305,-23.306) 27.305,-24.257 ; R8.2@26.727,-24.618 cw(c27.305,-24.899) 27.305,-24.257 ; CN1.3@28.628,-30.178 ccw(c27.501,-29.051) 29.095,-29.051 ccw(c30.689,-29.051) CN1.3@29.562,-30.178 ; CN1.3@28.808,-30.358 ccw(c28.114,-29.664) 29.095,-29.664 ccw(c30.076,-29.664) CN1.3@29.382,-30.358 ; CN1.3@29.045,-30.645 CN1.3@29.095,-30.645 29.095,-27.642 27.305,-25.852 27.305,-24.257
NetCN1_6: CN1.6 R15.2 U6.8 | length 21.1
  Top Layer w0.254: U6.8@26.021,-19.788 ccw(c26.506,-19.788) 26.163,-20.131 ; U6.8@26.022,-19.787 ccw(c26.126,-19.888) 26.023,-19.991 ; U6.8@26.023,-19.138 26.023,-19.991 ; R15.2@28.391,-24.618 ccw(c27.813,-24.899) 27.813,-24.257 ; R15.2@28.495,-23.969 cw(c27.813,-23.306) 27.813,-24.257 ; R15.2@28.94,-24.257 27.813,-24.257 ; 31.759,-26.933 cw(c30.587,-28.105) CN1.6@32.245,-28.105 ; 31.822,-26.996 ccw(c32.905,-25.913) CN1.6@32.905,-27.445 ; 32.193,-27.367 cw(c31.455,-28.105) CN1.6@32.499,-28.105 ; 32.256,-27.43 ccw(c32.905,-26.78) CN1.6@32.905,-27.699 ; CN1.6@32.905,-28.105 32.931,-28.105 31.623,-26.797 28.956,-26.797 27.813,-25.654 27.813,-24.257 ; 26.023,-19.991 26.361,-20.329 27.06,-20.329 27.813,-21.082 27.813,-24.257
NetCN1_8: CN1.8 LR3.1 | length 23.8
  Bottom Layer w0.254: LR3.1@30.975,-32.531 cw(c31.94,-33.496) 31.94,-32.131 ; LR3.1@30.988,-32.844 31.164,-32.844 31.877,-32.131 ; LR3.1@31.154,-32.71 cw(c32.553,-34.109) 32.553,-32.131 ; LR3.1@31.334,-32.89 cw(c33.166,-34.722) 33.166,-32.131 ; LR3.1@31.393,-32.281 ccw(c31.493,-31.747) 31.877,-32.131 ; LR3.1@31.514,-33.07 cw(c33.779,-35.335) 33.779,-32.131 ; LR3.1@31.693,-33.249 cw(c34.393,-35.949) 34.393,-32.131 ; LR3.1@31.802,-32.59 cw(c32.159,-32.413) 31.877,-32.131 ; CN1.8@34.978,-28.572 cw(c33.851,-29.699) 35.445,-29.699 cw(c37.039,-29.699) CN1.8@35.912,-28.572 ; CN1.8@35.052,-28.067 CN1.8@35.23,-27.89 ; CN1.8@35.158,-28.392 cw(c34.464,-29.086) 35.445,-29.086 cw(c36.426,-29.086) CN1.8@35.732,-28.392 ; CN1.8@35.445,-28.105 35.445,-31.357 34.671,-32.131 31.877,-32.131
NetCN1_9: CN1.9 R20.2 | length 32.3
  Top Layer w0.254: v1@19.939,-31.923 cw(c19.939,-32.341) 20.234,-32.045 cw(c20.53,-31.75) v1@20.112,-31.75 ; v1(19.939,-31.75) 20.52,-32.331 23.949,-32.331 27.686,-36.068 27.686,-38.584 CN1.9@24.375,-41.895
  Bottom Layer w0.254: R20.2@18.949,-26.424 cw(c16.558,-28.815) 19.939,-28.815 ; R20.2@19.128,-26.245 cw(c17.172,-28.201) 19.939,-28.201 ; R20.2@19.304,-26.146 19.304,-26.543 19.621,-26.226 19.939,-26.543 v1(19.939,-31.75) ; R20.2@19.308,-26.065 cw(c17.785,-27.588) 19.939,-27.588 ; R20.2@19.488,-25.885 cw(c18.398,-26.975) 19.939,-26.975 ; v1@19.817,-31.628 ccw(c19.521,-31.332) 19.939,-31.332 ccw(c20.357,-31.332) v1@20.061,-31.628
NetCN1_12: CN1.12 R21.2 | length 46.3
  Top Layer w0.254: v1@21.29,-27.686 cw(c20.872,-27.686) 21.168,-27.981 cw(c21.463,-28.277) v1@21.463,-27.859 ; v1(21.463,-27.686) 21.082,-28.067 21.082,-31.75 21.209,-31.877 24.137,-31.877 28.14,-35.88 28.14,-38.789 25.654,-41.275 25.654,-42.545 26.162,-43.053 36.467,-43.053 CN1.12@37.625,-41.895 ; CN1.12@37.002,-41.895 cw(c35.498,-41.895) 36.561,-42.959 cw(c37.625,-44.022) CN1.12@37.625,-42.518 ; CN1.12@37.256,-41.895 cw(c36.365,-41.895) 36.995,-42.525 cw(c37.625,-43.155) CN1.12@37.625,-42.264
  Bottom Layer w0.254: v1@21.341,-27.564 ccw(c21.045,-27.268) 21.463,-27.268 ccw(c21.881,-27.268) v1@21.585,-27.564 ; v1(21.463,-27.686) 21.463,-26.781 ; v1@21.463,-27.473 cw(c22.685,-27.473) R21.2@22.281,-26.32 ; 21.463,-27.115 cw(c22.56,-27.115) R21.2@22.197,-26.08 ; 21.463,-26.757 cw(c22.434,-26.757) R21.2@22.112,-25.841 ; 21.552,-27.14 ccw(c22.137,-27.297) v1@21.613,-27.6 ; R21.2@21.623,-26.173 cw(c21.022,-26.34) 21.463,-26.781 ; R21.2@22.08,-26.584 ccw(c21.962,-27.28) 21.463,-26.781 ; R21.2@22.225,-26.019 21.463,-26.781
NetD9_1: D9.1 R107.2 | length 22
  Bottom Layer w0.508: R107.2@47.867,35.945 cw(c46.86,34.938) 48.284,34.938 ; R107.2@48.218,36.296 48.284,36.23 48.284,30.583 50.546,28.321 53.213,28.321 55.245,26.289 D9.1@55.245,25.626 ; 48.284,35.259 cw(c49.255,35.259) R107.2@48.568,35.945 ; 53.247,28.287 cw(c50.585,25.626) D9.1@54.349,25.626 ; 54.114,27.42 cw(c52.32,25.626) D9.1@54.857,25.626
NetD10_2: D10.2 K1.1 U14.15 | length 17.5
  Top Layer w0.254: D10.2@48.133,3.622 48.321,3.622 49.022,2.921 ; D10.2@48.352,3.113 cw(c48.514,2.413) 49.022,2.921 ; D10.2@48.756,3.602 ccw(c49.667,3.566) 49.022,2.921 ; U14.15@51.392,3.6 cw(c50.641,3.461) 51.181,2.921 ; U14.15@51.44,5.354 ccw(c51.144,5.65) 51.562,5.65 ccw(c51.98,5.65) U14.15@51.684,5.354 ; U14.15@51.464,3.49 cw(c51.334,3.302) 51.562,3.302 ; 51.522,3.262 ccw(c51.217,3.568) U14.15@51.642,3.647 ; U14.15@51.66,3.49 ccw(c51.79,3.302) 51.562,3.302 ; K1.1@52.023,8.638 cw(c50.449,8.623) 51.562,7.51 ; K1.1@52.277,8.64 cw(c51.297,8.631) 51.99,7.938 cw(c52.683,7.245) K1.1@52.692,8.225 ; K1.1@52.69,7.971 ccw(c52.675,6.397) 51.562,7.51 ; K1.1@52.696,8.644 51.562,7.51 ; 49.022,2.921 51.181,2.921 ; 51.181,2.921 51.562,3.302 ; 51.562,3.302 U14.15@51.562,4.432 51.562,7.51
NetD11_1: D11.1 R113.2 | length 19.7
  Bottom Layer w0.508: R113.2@54.232,35.945 cw(c53.386,35.099) 54.583,35.099 cw(c55.781,35.099) R113.2@54.934,35.945 ; R113.2@54.583,36.296 54.583,31.65 60.244,25.989 D11.1@60.244,25.626 ; 58.458,27.775 cw(c56.309,25.626) D11.1@59.348,25.626 ; 59.325,26.908 cw(c58.044,25.626) D11.1@59.856,25.626 ; 59.334,26.899 ccw(c60.244,27.809) D11.1@60.244,26.522
NetD12_2: D12.2 K2.1 U14.13 | length 25.6
  Top Layer w0.254: D12.2@45.339,3.622 46.548,2.413 53.594,2.413 54.102,2.921 U14.13@54.102,4.432 ; D12.2@45.439,3.099 cw(c45.439,2.078) 46.161,2.8 ; D12.2@45.708,3.622 ccw(c46.599,3.622) D12.2@45.969,2.992 ; D12.2@45.962,3.622 ccw(c47.466,3.622) 46.403,2.558 ; U14.13@53.98,3.51 cw(c53.684,3.214) 54.102,3.214 cw(c54.52,3.214) U14.13@54.224,3.51 ; U14.13@53.98,5.354 ccw(c53.684,5.65) 54.102,5.65 ccw(c54.52,5.65) U14.13@54.224,5.354 ; U14.13@54.102,4.191 54.102,6.985 54.737,7.62 56.642,7.62 ; K2.1@57.022,8 cw(c57.579,7.444) K2.1@57.655,8.227 ; K2.1@57.024,8.611 cw(c55.716,8.546) 56.642,7.62 ; K2.1@57.047,8.025 ccw(c56.488,8.584) K2.1@57.278,8.623 ; K2.1@57.631,7.974 ccw(c57.511,6.751) 56.642,7.62 ; K2.1@57.696,8.644 57.696,8.674 56.642,7.62
NetD13_1: D13.1 R119.2 | length 17.7
  Bottom Layer w0.508: R119.2@60.598,35.945 cw(c59.751,35.099) 60.948,35.099 cw(c62.146,35.099) R119.2@61.299,35.945 ; R119.2@60.948,36.296 60.948,33.032 62.484,31.496 62.484,28.409 65.243,25.65 D13.1@65.243,25.626 ; 63.697,27.197 cw(c62.126,25.626) D13.1@64.347,25.626 ; 63.755,27.139 ccw(c65.243,28.627) D13.1@65.243,26.522
NetD14_2: D14.2 K3.1 U14.11 | length 27.2
  Top Layer w0.254: U14.11@56.52,3.51 cw(c56.224,3.214) 56.642,3.214 cw(c57.06,3.214) U14.11@56.764,3.51 ; U14.11@56.52,5.354 ccw(c56.224,5.65) 56.642,5.65 ccw(c57.06,5.65) U14.11@56.764,5.354 ; 61.512,7.41 ccw(c60.278,8.644) K3.1@62.023,8.644 ; 61.632,7.53 cw(c62.696,6.467) K3.1@62.696,7.971 ; 61.945,7.843 ccw(c61.145,8.644) K3.1@62.277,8.644 ; K3.1@62.066,7.964 cw(c62.696,7.334) K3.1@62.696,8.225 ; K3.1@62.696,8.644 62.696,8.594 61.468,7.366 57.15,7.366 56.642,6.858 56.642,2.921 57.15,2.413 62.992,2.413 64.201,3.622 D14.2@64.22,3.622 ; 63.169,2.59 ccw(c62.138,3.622) D14.2@63.597,3.622 ; 63.366,2.787 cw(c64.12,2.033) D14.2@64.12,3.099 ; D14.2@63.603,3.024 ccw(c63.005,3.622) D14.2@63.851,3.622
  Bottom Layer w0.254: K3.1@62.696,8.644 K3.1@62.73,8.644
NetD15_1: D15.1 R125.2 | length 21.2
  Bottom Layer w0.508: R125.2@66.963,35.945 cw(c66.116,35.099) 67.314,35.099 cw(c68.511,35.099) R125.2@67.665,35.945 ; R125.2@67.314,36.296 67.314,34.921 69.596,32.639 69.596,26.273 D15.1@70.243,25.626 ; 69.596,26.897 ccw(c71.514,26.897) D15.1@70.158,25.541 ; 69.596,28.124 ccw(c72.74,28.124) D15.1@70.517,25.9 ; 69.596,29.35 ccw(c73.967,29.35) D15.1@70.876,26.26
NetD16_2: D16.2 K4.1 U14.9 | length 26.7
  Top Layer w0.254: U14.9@59.06,5.354 ccw(c58.764,5.65) 59.182,5.65 ccw(c59.6,5.65) U14.9@59.304,5.354 ; U14.9@59.355,3.632 ccw(c59.956,3.632) 59.531,3.207 ; 60.139,2.921 ccw(c60.139,3.916) D16.2@61.106,3.685 ; 60.461,2.921 ccw(c60.461,3.839) D16.2@61.353,3.625 ; 60.783,2.921 ccw(c60.783,3.762) D16.2@61.6,3.566 ; D16.2@60.859,3.744 cw(c59.817,3.993) 59.817,2.921 ; D16.2@60.879,3.438 cw(c60.422,3.266) 60.767,2.921 ; D16.2@61.301,3.103 ccw(c61.22,2.468) 60.767,2.921 ; D16.2@61.468,3.622 60.767,2.921 ; 66.545,7.49 ccw(c65.391,8.644) K4.1@67.023,8.644 ; 66.552,7.497 cw(c67.696,6.353) K4.1@67.696,7.971 ; K4.1@66.979,7.924 ccw(c66.258,8.644) K4.1@67.277,8.644 ; K4.1@66.986,7.931 cw(c67.696,7.221) K4.1@67.696,8.225 ; K4.1@67.696,8.644 67.696,8.641 65.967,6.912 59.617,6.912 59.182,6.477 U14.9@59.182,4.432 59.182,3.556 59.817,2.921 ; 59.817,2.921 60.767,2.921
  Bottom Layer w0.254: K4.1@67.683,8.644 K4.1@67.696,8.644
NetD17_1: D17.1 R131.2 | length 17.8
  Bottom Layer w0.508: R131.2@73.679,36.296 77.216,32.759 77.216,29.591 75.242,27.617 ; R131.2@73.879,35.8 cw(c73.879,35.085) R131.2@74.385,35.591 ; R131.2@74.375,36.296 ccw(c76.056,36.296) 74.867,35.108 ; D17.1@74.648,26.297 ccw(c73.478,27.617) 75.242,27.617 ; D17.1@75.242,25.626 75.242,27.617 ; D17.1@75.836,26.297 cw(c77.005,27.617) 75.242,27.617
NetD18_2: D18.2 K5.1 U15.15 | length 19
  Top Layer w0.254: D18.2@69.723,3.622 70.424,2.921 ; D18.2@69.89,3.103 cw(c69.971,2.468) 70.424,2.921 ; D18.2@70.312,3.438 ccw(c70.769,3.266) 70.424,2.921 ; K5.1@72.22,8.168 cw(c69.97,5.918) 73.152,5.918 ; K5.1@72.4,8.348 cw(c70.584,6.532) 73.152,6.532 ; K5.1@72.579,8.527 cw(c71.197,7.145) 73.152,7.145 ; K5.1@72.696,8.644 73.152,8.188 U15.15@73.152,4.432 73.152,3.175 72.898,2.921 70.424,2.921 ; K5.1@72.759,8.707 cw(c71.81,7.758) 73.152,7.758 ; U15.15@73.03,3.51 cw(c72.734,3.214) 73.152,3.214 cw(c73.57,3.214) U15.15@73.274,3.51 ; U15.15@73.03,5.354 ccw(c72.734,5.65) 73.152,5.65 ccw(c73.57,5.65) U15.15@73.274,5.354
NetD19_1: D19.1 R137.2 | length 22.5
  Bottom Layer w0.508: R137.2@79.977,36.228 80.436,36.228 84.963,31.701 84.963,29.21 83.947,28.194 82.423,28.194 80.241,26.012 D19.1@80.241,25.626 ; D19.1@80.241,26.522 ccw(c80.241,27.754) 81.112,26.883 ; R137.2@80.245,35.8 cw(c80.245,34.305) 81.302,35.362 ; D19.1@80.629,25.626 cw(c82.497,25.626) 81.176,26.947 ; R137.2@80.741,36.296 ccw(c81.641,36.296) 81.004,35.66 ; D19.1@81.137,25.626 cw(c84.232,25.626) 82.043,27.814
NetD20_2: D20.2 K6.1 U15.13 | length 24.1
  Top Layer w0.254: D20.2@66.971,3.622 68.18,2.413 75.184,2.413 75.692,2.921 U15.13@75.692,4.432 75.692,6.604 77.696,8.608 K6.1@77.696,8.644 ; D20.2@67.071,3.099 cw(c67.071,2.078) 67.793,2.8 ; D20.2@67.34,3.622 ccw(c68.231,3.622) D20.2@67.601,2.992 ; D20.2@67.594,3.622 ccw(c69.098,3.622) 68.035,2.558 ; U15.13@75.57,3.51 cw(c75.274,3.214) 75.692,3.214 cw(c76.11,3.214) U15.13@75.814,3.51 ; U15.13@75.57,5.354 ccw(c75.274,5.65) 75.692,5.65 ccw(c76.11,5.65) U15.13@75.814,5.354 ; 76.522,7.434 ccw(c75.311,8.644) K6.1@77.023,8.644 ; 76.609,7.521 cw(c77.696,6.433) K6.1@77.696,7.971 ; K6.1@76.955,7.867 ccw(c76.179,8.644) K6.1@77.277,8.644 ; K6.1@77.042,7.954 cw(c77.696,7.3) K6.1@77.696,8.225
NetD21_1: D21.1 R143.2 | length 25.1
  Bottom Layer w0.508: D21.1@85.24,25.626 85.24,25.818 87.243,27.821 90.559,27.821 92.456,29.718 92.456,31.369 90.424,33.401 89.305,33.401 R143.2@86.41,36.296 ; D21.1@85.24,26.522 ccw(c85.24,28.222) 86.442,27.02 ; D21.1@85.628,25.626 cw(c87.028,25.626) D21.1@86.038,26.616 ; D21.1@86.136,25.626 cw(c88.762,25.626) 86.905,27.483 ; R143.2@86.61,35.8 cw(c86.61,35.085) R143.2@87.115,35.591 ; R143.2@87.106,36.296 ccw(c88.786,36.296) 87.598,35.108
NetD22_2: D22.2 K7.1 U15.11 | length 24.7
  Top Layer w0.254: U15.11@78.11,3.51 cw(c77.814,3.214) 78.232,3.214 cw(c78.65,3.214) U15.11@78.354,3.51 ; U15.11@78.11,5.354 ccw(c77.814,5.65) 78.232,5.65 ccw(c78.65,5.65) U15.11@78.354,5.354 ; K7.1@82.025,8.596 cw(c80.775,8.506) 81.661,7.62 ; K7.1@82.045,8.004 cw(c82.59,7.459) K7.1@82.659,8.227 ; K7.1@82.054,8.013 ccw(c81.509,8.559) K7.1@82.278,8.614 ; K7.1@82.636,7.974 ccw(c82.527,6.754) 81.661,7.62 ; K7.1@82.696,8.644 82.696,8.655 81.661,7.62 ; 84.661,2.558 ccw(c83.598,3.622) D22.2@85.102,3.622 ; 84.903,2.8 cw(c85.625,2.078) D22.2@85.625,3.099 ; D22.2@85.095,2.992 ccw(c84.465,3.622) D22.2@85.356,3.622 ; D22.2@85.725,3.622 84.516,2.413 78.74,2.413 78.232,2.921 U15.11@78.232,4.432 78.232,6.604 79.248,7.62 81.661,7.62
NetD23_1: D23.1 R149.2 | length 22.4
  Bottom Layer w0.508: D23.1@90.239,25.626 90.239,25.817 92.87,28.448 95.25,28.448 96.266,29.464 96.266,32.766 R149.2@92.756,36.276 ; D23.1@90.239,26.522 ccw(c90.239,28.224) 91.443,27.021 ; D23.1@90.627,25.626 cw(c92.025,25.626) D23.1@91.037,26.614 ; D23.1@91.135,25.626 cw(c93.759,25.626) 91.904,27.482 ; R149.2@92.975,35.8 cw(c92.975,35.181) R149.2@93.413,35.619 ; R149.2@93.471,36.296 ccw(c95.247,36.296) 93.991,35.041
NetD24_2: D24.2 K8.1 U15.9 | length 21.6
  Top Layer w0.254: U15.9@80.65,5.354 ccw(c80.354,5.65) 80.772,5.65 ccw(c81.19,5.65) U15.9@80.894,5.354 ; U15.9@80.674,3.49 cw(c80.544,3.302) 80.772,3.302 ; U15.9@80.692,3.647 ccw(c81.117,3.568) 80.812,3.262 ; U15.9@80.87,3.49 ccw(c81,3.302) 80.772,3.302 ; U15.9@80.942,3.6 ccw(c81.693,3.461) 81.153,2.921 ; D24.2@82.308,3.602 cw(c81.397,3.566) 82.042,2.921 ; D24.2@82.712,3.113 ccw(c82.55,2.413) 82.042,2.921 ; D24.2@82.931,3.622 82.743,3.622 82.042,2.921 ; 86.448,7.454 cw(c87.696,6.206) K8.1@87.696,7.971 ; 86.588,7.594 ccw(c85.538,8.644) K8.1@87.023,8.644 ; 86.882,7.888 cw(c87.696,7.073) K8.1@87.696,8.225 ; K8.1@87.022,8.028 ccw(c86.406,8.644) K8.1@87.277,8.644 ; K8.1@87.696,8.644 87.696,8.702 85.979,6.985 81.28,6.985 80.772,6.477 U15.9@80.772,4.432 80.772,3.302 ; 80.772,3.302 81.153,2.921 ; 81.153,2.921 82.042,2.921
NetD25_1: D25.1 R155.2 | length 20.6
  Bottom Layer w0.508: D25.1@95.238,25.626 95.238,25.816 97.743,28.321 99.314,28.321 100.33,29.337 100.33,35.107 R155.2@99.141,36.296 ; D25.1@95.238,26.522 ccw(c95.238,28.226) 96.443,27.021 ; D25.1@95.626,25.626 cw(c97.022,25.626) D25.1@96.035,26.613 ; D25.1@96.134,25.626 cw(c98.757,25.626) 96.902,27.48 ; R155.2@99.341,35.8 cw(c99.341,35.085) R155.2@99.846,35.591 ; R155.2@99.837,36.296 ccw(c101.517,36.296) 100.329,35.108
NetD26_2: D26.2 K9.1 U16.15 | length 19.8
  Top Layer w0.254: D26.2@91.313,3.622 D26.2@91.501,3.622 ; D26.2@91.413,3.891 ccw(c91.413,4.753) D26.2@92.022,4.143 ; D26.2@91.413,4.145 ccw(c91.413,5.62) 92.456,4.577 ; D26.2@91.532,3.113 cw(c91.694,2.413) 92.202,2.921 ; D26.2@91.936,3.602 ccw(c92.847,3.566) 92.202,2.921 ; D26.2@91.936,3.622 cw(c92.986,3.622) 92.244,4.365 ; K9.1@92.22,8.168 cw(c91.071,7.019) 92.696,7.019 cw(c94.321,7.019) K9.1@93.172,8.168 ; K9.1@92.4,8.348 cw(c91.684,7.632) 92.696,7.632 cw(c93.708,7.632) K9.1@92.992,8.348 ; K9.1@92.696,8.644 92.696,4.817 D26.2@91.501,3.622 ; U16.15@94.874,3.51 cw(c94.578,3.214) 94.996,3.214 cw(c95.414,3.214) U16.15@95.118,3.51 ; U16.15@94.996,4.432 94.996,3.175 94.742,2.921 92.202,2.921 ; D26.2@91.501,3.622 92.202,2.921
NetD27_1: D27.1 R161.2 | length 19.5
  Bottom Layer w0.508: D27.1@100.106,25.757 104.14,29.791 104.14,34.93 R161.2@105.506,36.296 ; D27.1@100.238,25.626 D27.1@100.238,25.815 ; D27.1@100.238,26.522 ccw(c100.238,28.051) 101.319,26.97 ; D27.1@100.626,25.626 cw(c102.196,25.626) D27.1@101.086,26.737 ; D27.1@101.134,25.626 cw(c103.931,25.626) 101.953,27.604 ; 104.318,35.108 ccw(c103.13,36.296) R161.2@104.81,36.296 ; R161.2@104.801,35.591 cw(c105.306,35.085) R161.2@105.306,35.8
NetD28_2: D28.2 K10.1 U16.13 | length 24.2
  Top Layer w0.254: D28.2@88.519,3.622 89.728,2.413 97.282,2.413 97.536,2.667 U16.13@97.536,4.432 97.536,8.484 K10.1@97.696,8.644 ; D28.2@88.619,3.099 cw(c88.619,2.078) 89.341,2.8 ; D28.2@88.888,3.622 ccw(c89.779,3.622) D28.2@89.149,2.992 ; D28.2@89.142,3.622 ccw(c90.646,3.622) 89.583,2.558 ; K10.1@97.22,8.168 cw(c96.458,7.406) 97.536,7.406 ; U16.13@97.414,3.51 cw(c97.118,3.214) 97.536,3.214 cw(c97.954,3.214) U16.13@97.658,3.51 ; U16.13@97.414,5.354 ccw(c97.118,5.65) 97.536,5.65 ccw(c97.954,5.65) U16.13@97.658,5.354 ; 97.536,6.633 cw(c99.707,6.633) K10.1@98.172,8.168 ; 97.536,7.246 cw(c99.094,7.246) K10.1@97.992,8.348 ; K10.1@97.536,7.859 cw(c98.481,7.859) K10.1@97.813,8.527
NetD29_1: D29.1 R167.2 | length 21.3
  Bottom Layer w0.508: D29.1@105.029,25.916 107.823,28.71 107.823,32.004 111.872,36.053 R167.2@111.872,36.296 ; D29.1@105.237,25.626 D29.1@105.237,25.997 ; D29.1@105.237,26.522 ccw(c105.237,27.483) 105.917,26.804 ; D29.1@105.625,25.626 cw(c107.763,25.626) 106.251,27.138 ; D29.1@106.133,25.626 cw(c109.498,25.626) 107.118,28.005 ; 110.511,34.692 ccw(c108.908,36.296) R167.2@111.176,36.296 ; R167.2@111.379,35.56 ccw(c110.642,36.296) R167.2@111.684,36.296
NetD30_2: D30.2 K11.1 U16.11 | length 23.1
  Top Layer w0.254: U16.11@99.954,3.51 cw(c99.658,3.214) 100.076,3.214 cw(c100.494,3.214) U16.11@100.198,3.51 ; U16.11@99.954,5.354 ccw(c99.658,5.65) 100.076,5.65 ccw(c100.494,5.65) U16.11@100.198,5.354 ; 101.508,7.401 ccw(c100.266,8.644) K11.1@102.023,8.644 ; 101.641,7.534 cw(c102.696,6.479) K11.1@102.696,7.971 ; 101.942,7.835 ccw(c101.133,8.644) K11.1@102.277,8.644 ; K11.1@102.075,7.968 cw(c102.696,7.346) K11.1@102.696,8.225 ; K11.1@102.696,8.644 102.696,8.589 100.076,5.969 U16.11@100.076,4.432 100.076,3.048 100.584,2.54 106.68,2.54 107.762,3.622 D30.2@107.823,3.622 ; 106.803,2.663 ccw(c105.843,3.622) D30.2@107.2,3.622 ; 106.897,2.757 cw(c107.723,1.931) D30.2@107.723,3.099 ; D30.2@107.236,3.096 ccw(c106.71,3.622) D30.2@107.454,3.622
NetD31_1: D31.1 R173.2 | length 21.9
  Bottom Layer w0.508: D31.1@110.236,25.626 112.804,28.194 117.348,28.194 118.237,29.083 R173.2@118.237,36.296 ; D31.1@110.236,26.522 ccw(c110.236,28.685) 111.766,27.156 ccw(c113.295,25.626) D31.1@111.132,25.626 ; R173.2@117.886,35.945 cw(c117.04,35.099) 118.237,35.099 cw(c119.434,35.099) R173.2@118.588,35.945
NetD32_2: D32.2 K12.1 U16.9 | length 30.4
  Top Layer w0.254: U16.9@102.489,5.334 102.489,3.81 103.251,3.048 ; U16.9@102.494,5.354 ccw(c102.198,5.65) 102.616,5.65 ccw(c103.034,5.65) U16.9@102.738,5.354 ; U16.9@102.616,3.459 cw(c102.616,2.918) 102.998,3.301 ; U16.9@102.616,4.432 102.616,6.223 104.267,7.874 ; U16.9@102.789,3.632 ccw(c103.084,3.632) 102.875,3.424 ; 103.64,3.048 ccw(c103.64,4.187) D32.2@104.683,3.73 ; 104.028,3.048 ccw(c104.028,4.017) D32.2@104.915,3.628 ; D32.2@104.417,3.048 ccw(c104.417,3.846) D32.2@105.148,3.526 ; D32.2@104.45,3.832 cw(c103.251,4.357) 103.251,3.048 ; 104.871,7.874 ccw(c104.871,11.406) K12.1@107.396,8.937 ; D32.2@105.029,3.622 104.455,3.048 103.251,3.048 ; 105.474,7.874 ccw(c105.474,10.816) K12.1@107.578,8.759 ; 106.078,7.874 ccw(c106.078,10.226) K12.1@107.76,8.582 ; 106.681,7.874 ccw(c106.681,9.636) K12.1@107.941,8.404 ; K12.1@107.215,9.114 cw(c104.267,11.996) 104.267,7.874 ; K12.1@107.696,8.644 106.926,7.874 104.267,7.874
NetDPNT_1: DPNT.1 R1.1 | length 9.3
  Top Layer w0.254: v1@15.245,12.07 cw(c14.949,11.774) 15.367,11.774 cw(c15.785,11.774) v1@15.489,12.07 ; v1@15.283,12.041 cw(c15.092,11.696) 15.473,11.798 cw(c15.853,11.9) v1@15.515,12.103 ; 15.367,11.81 ccw(c15.995,11.81) DPNT.1@15.752,11.231 ; DPNT.1@15.748,10.983 15.367,11.364 v1(15.367,12.192) ccw(c16.155,12.192) DPNT.1@15.85,11.465
  Bottom Layer w0.254: v1@15.245,12.07 cw(c14.949,11.774) 15.367,11.774 cw(c15.785,11.774) v1@15.489,12.07 ; v1@15.282,12.041 cw(c15.086,11.691) 15.473,11.795 cw(c15.861,11.899) v1@15.516,12.104 ; 15.367,11.831 ccw(c16.031,11.831) R1.1@15.806,11.206 ; R1.1@15.748,10.414 15.748,10.922 15.367,11.303 v1(15.367,12.192) ccw(c16.161,12.192) R1.1@15.892,11.445
NetDPNT_2: DPNT.2 U3.13 | length 9.9
  Top Layer w0.254: DPNT.2@15.113,9.083 15.367,8.829 15.367,5.715 15.85,5.232 U3.13@17.326,5.232 ; 15.367,7.142 cw(c17.589,7.142) DPNT.2@16.018,8.713 ; 15.367,7.755 cw(c16.976,7.755) DPNT.2@15.838,8.893 ; 15.367,8.368 cw(c16.363,8.368) DPNT.2@15.659,9.072 ; U3.13@16.365,5.142 ccw(c16.148,4.925) 16.148,5.232 ccw(c16.148,5.539) U3.13@16.365,5.322
NetJ2_2: J2.2 R110.1 | length 5.7
  Bottom Layer w0.508: R110.1@52.435,-41.148 J2.2@55.102,-41.148 ; R110.1@52.75,-41.463 cw(c53.512,-42.225) 53.512,-41.148 cw(c53.512,-40.071) R110.1@52.75,-40.833 ; J2.2@54.873,-41.393 ccw(c54.283,-41.983) 54.283,-41.148 ccw(c54.283,-40.313) J2.2@54.873,-40.903
NetLED1_1: LED1.1 R3.2 | length 7.2
  Top Layer w0.254: LED1.1@19.873,33.401 R3.2@21.701,33.401 ; LED1.1@20.243,33.031 cw(c21.136,32.138) 21.136,33.401 cw(c21.136,34.664) LED1.1@20.243,33.771 ; LED1.1@20.499,33.401 ccw(c20.499,34.839) R3.2@21.516,33.822 ; 20.576,33.401 cw(c20.576,32.072) R3.2@21.516,33.012 ; 21.112,33.401 ccw(c21.112,34.226) R3.2@21.695,33.643 ; 21.189,33.401 cw(c21.189,32.685) R3.2@21.695,33.191
NetLED2_1: LED2.1 R4.2 | length 8.3
  Top Layer w0.254: R4.2@11.684,33.401 LED2.1@13.782,33.401 ; R4.2@11.78,33.117 cw(c12.466,32.431) 12.466,33.401 ; R4.2@11.96,32.937 cw(c13.079,31.818) 13.079,33.401 ; R4.2@12.139,32.758 cw(c13.692,31.205) LED2.1@13.692,33.401 ; R4.2@12.139,33.568 ccw(c12.543,33.972) 12.543,33.401 ; LED2.1@13.412,33.031 ccw(c12.519,32.138) 12.519,33.401 ccw(c12.519,34.664) LED2.1@13.412,33.771
NetLR4_2: LR4.2 R107.1 | length 6.8
  Bottom Layer w0.508: LR4.2@45.085,39.546 45.235,39.396 R107.1@48.218,39.396 ; LR4.2@45.7,39.231 cw(c46.1,38.831) 46.1,39.396 ; LR4.2@45.7,39.861 ccw(c46.824,40.985) 46.824,39.396 ; R107.1@47.667,39.045 ccw(c46.82,38.199) 46.82,39.396 ccw(c46.82,40.593) R107.1@47.667,39.747